# Altium PCB F100_V3.PcbDoc
Units mil, origin at the board's own origin, x right, y up, seen from the top; angles counter-clockwise.
Board outline 1968.74 x 1970.1 mil, 2 copper layers (Top Layer, Bottom Layer); 9 components, 8 nets, 28 pads, 3 vias.
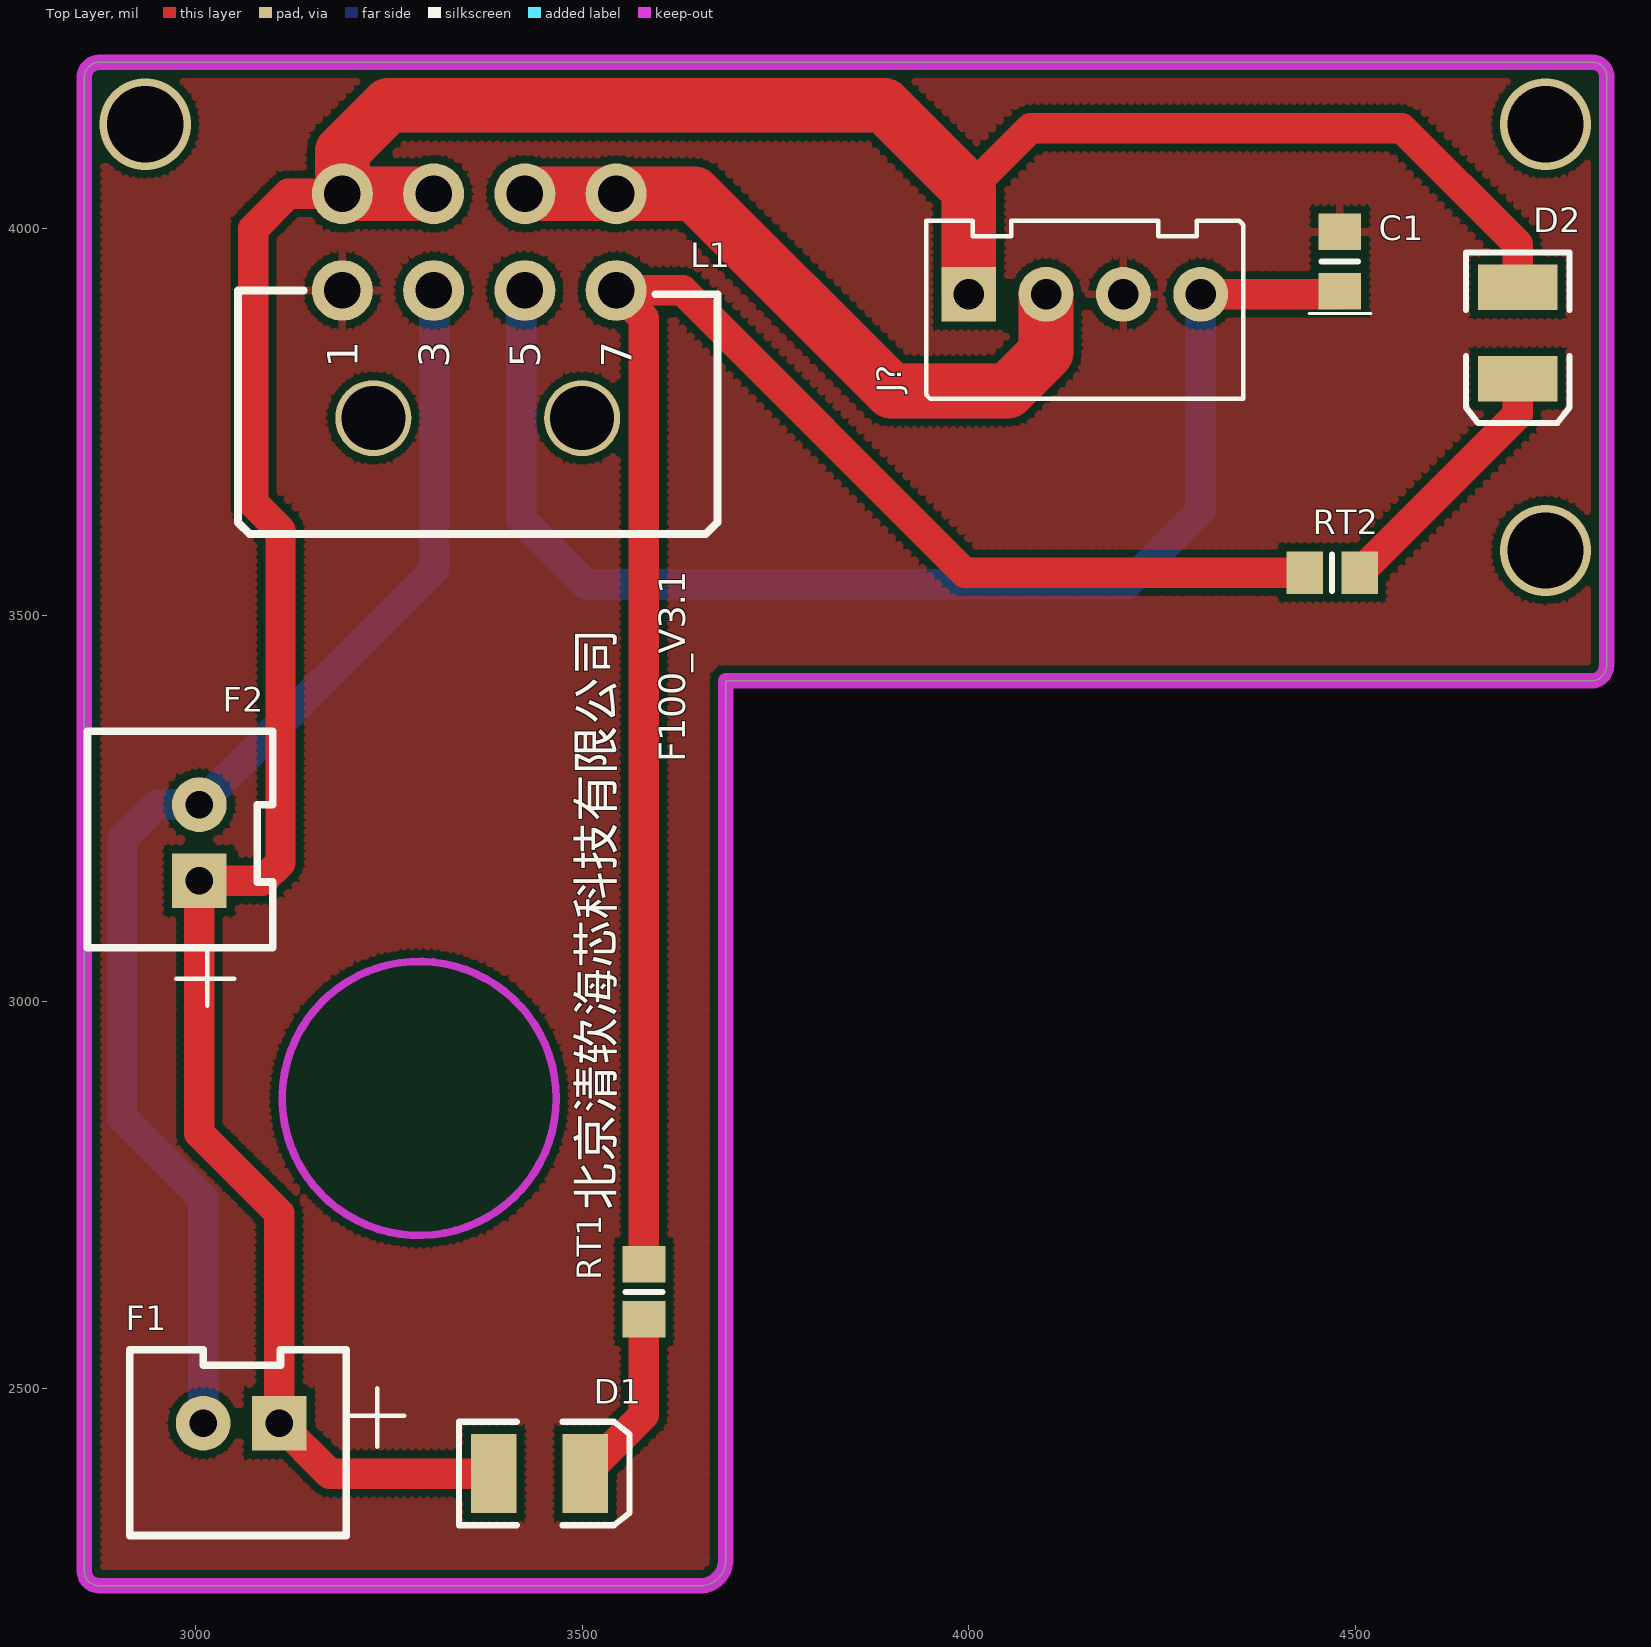
[diagram p0: Top Layer view]
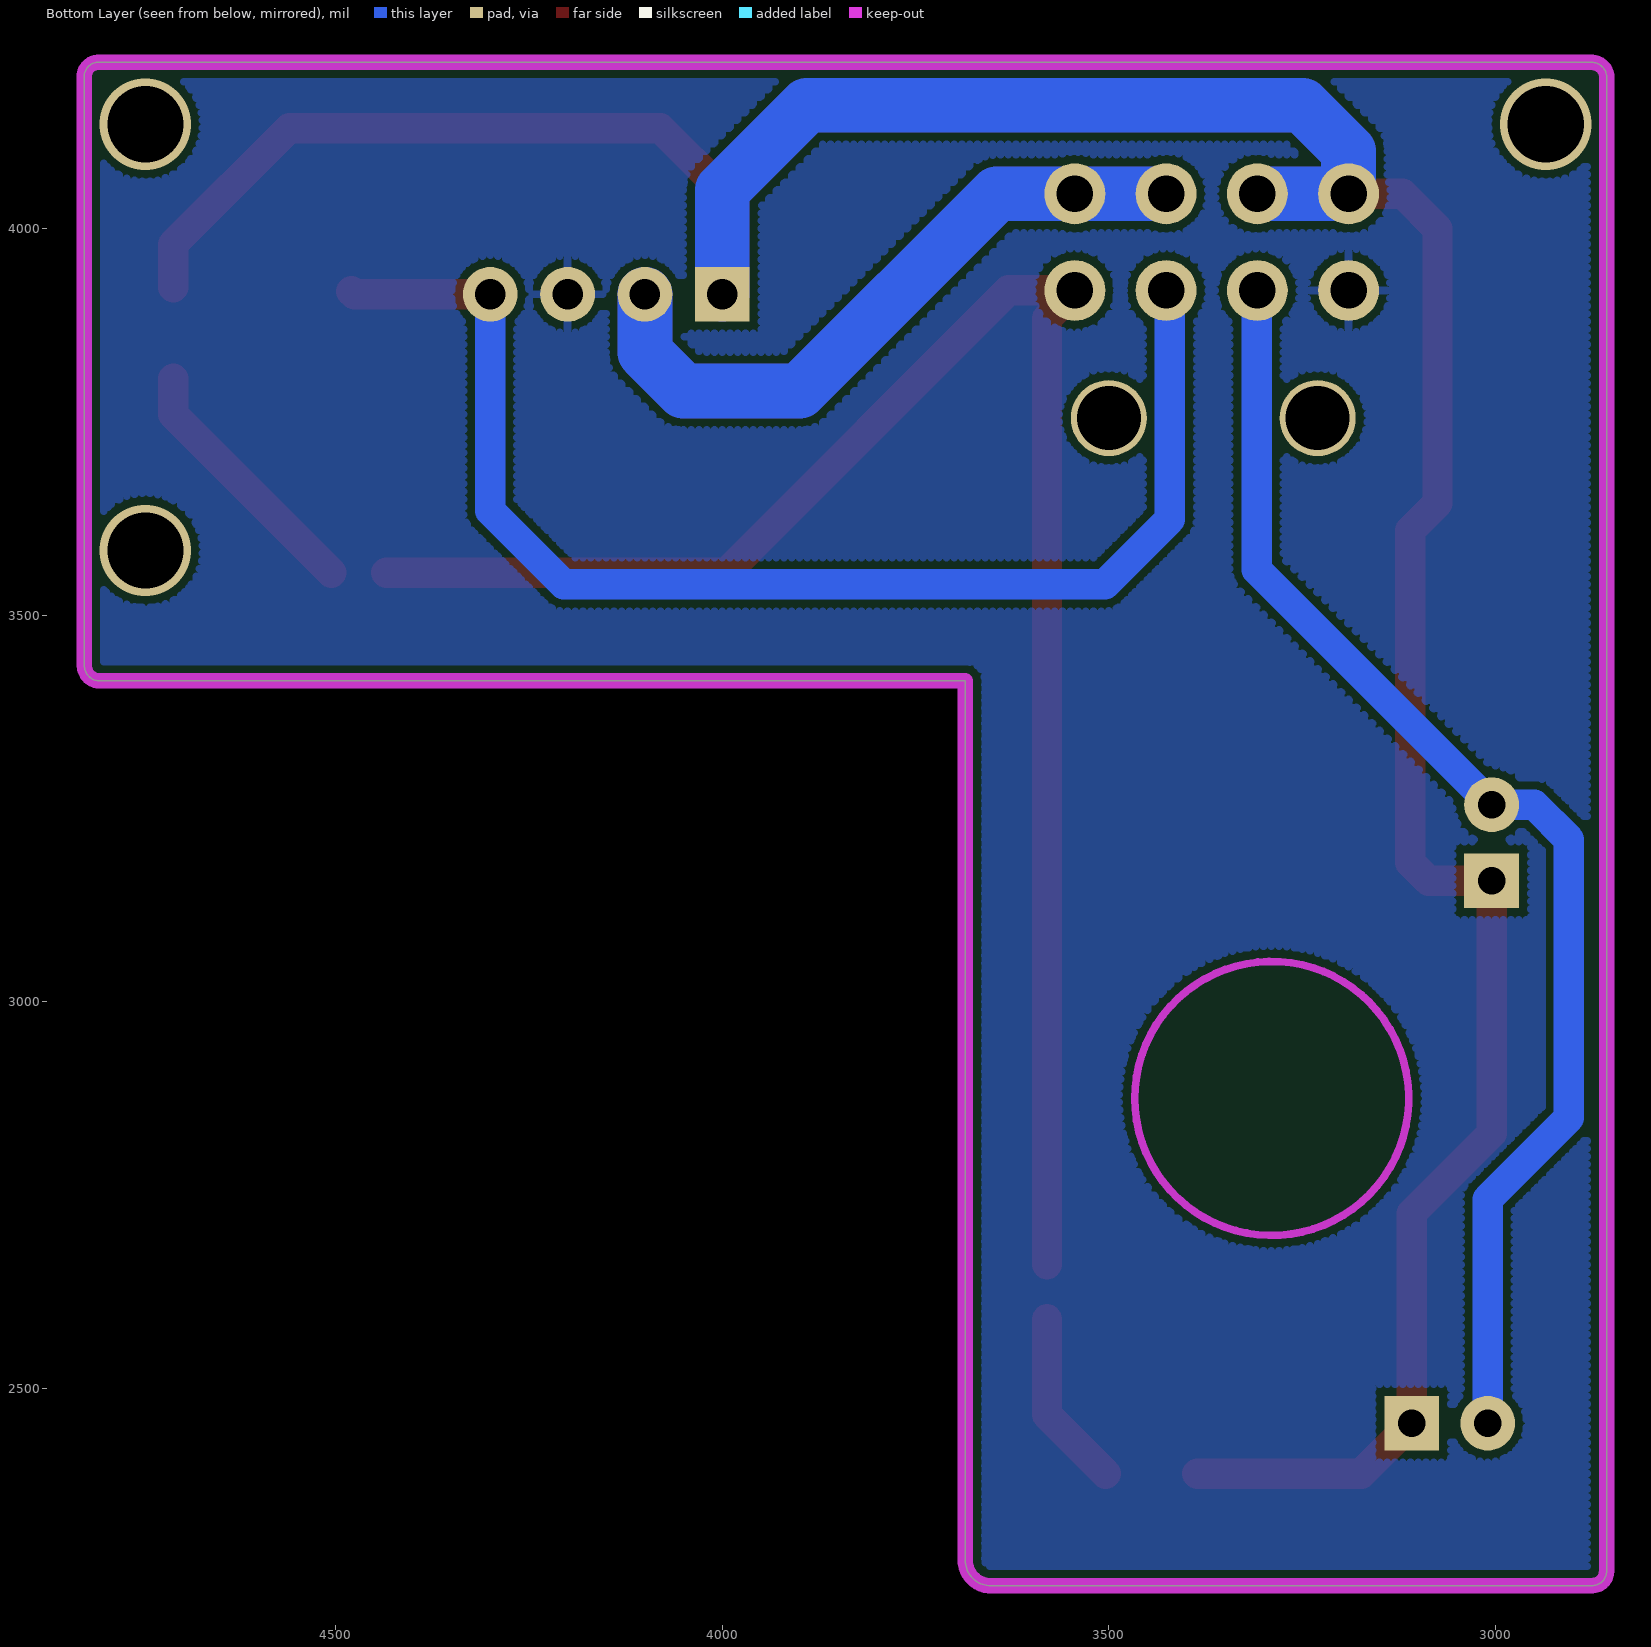
[diagram p1: Bottom Layer view, seen from below]

## Layer stack, top to bottom
Top Solder: solder mask 0.4, Solder Resist, Dk 3.5
Top Layer: signal copper 1.4
Dielectric 1: dielectric 12.6, FR-4, Dk 4.8
Bottom Layer: signal copper 1.4
Bottom Solder: solder mask 0.4, Solder Resist, Dk 3.5

## Board outline
2856.26,2263.74 2856.26,4195 cw(c2875.63,4195.63) 2875,4215 4805,4215 cw(c4806.82,4196.82) 4825,4198.64 4825,3435 cw(c4805,3435) 4805,3415 3685.6,3415 3685.6,2275 cw(c3652.8,2277.8) 3650,2245 2875,2245 cw(c2875,2263.74)

## Design rules (kind name [scope] priority, off if disabled: settings)
Clearance [All] p1: gap=10
PolygonConnect [All] p1: connectstyle=Relief reliefconductorwidth=10 reliefentries=4 polygonreliefangle="90 Angle" airgapwidth=10
RoutingVias [All] p1: holewidth=28 width=50 viastyle="Through Hole" minholewidth=28 minwidth=50 maxholewidth=28 maxwidth=50
SolderMaskExpansion [All] p1: expansion=4
Width [All] p1: maxlimit=196.85 minlimit=10 preferedwidth=10
30 further rules are at their usual default settings.

## Components (designator, comment, footprint, x,y, rotation, side; value= is the part's Value field where it differs from the comment)
C1 "Cap" 0805 4480,3915 r90 top
D1 "LED3" A190_LED 3445,2390 r0 top
D2 "LED3" A190_LED 4710,3865 r270 top
F1 "P2" P2_254 3010,2455 r0 top
F2 "P2" P2_254 3005,3255 r270 top
J? "CON4" DIP_4 4245,3915 r180 top
L1 "Component_8" M8 3190,3920 r90 top
RT1 "Res Thermal" 6-0805_N 3580,2625 r90 top
RT2 "Res Thermal" 6-0805_N 4470,3555 r180 top

## Footprints (in the part's own frame and the unit in brackets; to place one, negate y for a bottom-side part, rotate by r counter-clockwise, add the part's x,y. Pads: shape width x height; smd on the part's side, far side on the other; paste and mask are expansions set on the pad)
6-0805_N [mm] "Chip Resistor, Body 2.0x1.2mm, IPC Medium Density"
  rect 1.2x1.4 smd: 1(-0.9,0) 2(0.9,0)
  silkscreen extent 0,-0.6 0,0.6, body extent -1.07,-0.7 1.07,0.7, height 0.7
0805 [mm]
  rect 1.2x1.4 smd: 1(0.1,0) 2(2.05,0)
  silkscreen extent -0.64,-1.02 1.07,1.02, body extent 0,-0.7 2.15,0.7, height 0.65
A190_LED [mm]
  rect 1.5x2.6 smd: 1(-1.5,0) 2(1.5,0)
  silkscreen extent -2.65,-1.7 2.95,1.7
DIP_4 [mm]
  rect 1.8x1.8 hole 1: 1(6.223,0)
  round 1.8 hole 1: 2(3.683,0) 3(1.143,0) 4(-1.397,0)
  silkscreen extent -2.79,-2.41 7.62,3.43
M8 [mm]
  round 2 hole 1.2: 1(0,0) 2(3.175,0) 3(0,-2.997) 4(3.175,-2.997) 5(0,-5.994) 6(3.175,-5.994) 7(0,-8.992) 8(3.175,-8.992)
  round 2.5 hole 2.1: 9(-4.191,-1.016) 10(-4.191,-7.874)
  silkscreen extent -8,-12.32 0,3.43
P2_254 [mm]
  rect 1.8x1.8 hole 0.9: 1(2.5,0)
  round 1.8 hole 0.9: 2(0,0)
  silkscreen extent -2.41,-3.68 6.6,2.41

## Part data
C1: "Capacitor"
D1 D2: "Typical BLUE SiC LED"
RT1 RT2: "Thermistor"

## Via types
v1: diameter 118.11, hole 98.43, Top Layer to Bottom Layer, 3 vias

## Nets (pads, with @x,y where several pads share a name; then routed paths per layer and width w, separated by ;. In a path a pad name is that pad's centre, name@x,y a point inside that pad or via, vN(x,y) a via of type N, cw(c..) or ccw(c..) an arc to the next point about the centre after c; other vN are vias at no path point)
+12V: D1.1 D2.1 F1.1 F2.1 J?.1 L1.2 L1.4 | length 5369
  Top Layer w39.37: L1.2 3120,4045 3075,4000 3075,3645 3110,3610 3110,3180 3086.57,3156.57 F2.1 3005,2830 3108.43,2726.57 F1.1 3173.43,2390 D1.1 ; 4000,4050 4080,4130 4560,4130 4710,3980 D2.1
  Top Layer w70.87: L1.4 L1.2 3190,4100 3249.57,4159.57 3890.43,4159.57 4000,4050 J?.1
  Bottom Layer w70.87: L1.4 L1.2 3190,4100 3249.57,4159.57 3890.43,4159.57 4000,4050 J?.1
D_C: L1.7 RT1.2 RT2.2 | length 2316.2
  Top Layer w39.37: RT1.2 3580,3884 L1.7 3630,3920 3995,3555 RT2.2
F_C: F1.2 F2.2 L1.3 | length 1708.9
  Bottom Layer w39.37: F1.2 3010,2745 2905,2850 2905,3210 2950,3255 F2.2 3308.9,3558.9 3308.9,3920 L1.3
GND: C1.2 J?.3 L1.1
H_C: J?.2 L1.6 L1.8 | length 1750.7
  Top Layer w70.87: L1.6 L1.8 3645,4045 3900,3790 4050,3790 4100,3840 J?.2
  Bottom Layer w70.87: L1.6 L1.8 3645,4045 3900,3790 4050,3790 4100,3840 J?.2
NetD1_2: D1.2 RT1.1 | length 231
  Top Layer w39.37: D1.2 3580,2465.94 RT1.1
NetD2_2: D2.2 RT2.1 | length 335.7
  Top Layer w39.37: RT2.1 4710,3759.57 D2.2
TR_C: C1.1 J?.4 L1.5 | length 1715.6
  Top Layer w39.37: J?.4 4476.05,3915 C1.1
  Bottom Layer w39.37: L1.5 3421.1,3920 3421.1,3623.9 3505,3540 4205,3540 4300,3635 J?.4
pads on no net: L1.9 L1.10
copper on no net:
  other v1: 4746.02,3583.82 2935,4135 4746.02,4135

## Polygon pours and split planes (outlines as drawn)
GND on Top Layer "Top Layer-No Net" (hatched 90Degree grid 10 track 10, remove dead copper, pour order 7): 2856.26,2263.74 2856.26,4195 cw(c2875.63,4195.63) 2875,4215 4805,4215 cw(c4806.82,4196.82) 4825,4198.64 4825,3435 cw(c4805,3435) 4805,3415 3685.6,3415 3685.6,2275 cw(c3652.8,2277.8) 3650,2245 2875,2245 cw(c2875,2263.74)
GND on Bottom Layer "Top Layer-No Net1" (hatched 90Degree grid 10 track 10, remove dead copper, pour order 9): 2856.26,2263.74 2856.26,4195 cw(c2875.63,4195.63) 2875,4215 4805,4215 cw(c4806.82,4196.82) 4825,4198.64 4825,3435 cw(c4805,3435) 4805,3415 3685.6,3415 3685.6,2275 cw(c3652.8,2277.8) 3650,2245 2875,2245 cw(c2875,2263.74)

## Keep-outs
Keep-Out Layer:
  circle w10: c3289.33,2875.16 r177.17
  lines w20: 2856.26,2263.74 ccw(c2875,2263.74) 2875,2245 3650,2245 ccw(c3652.8,2277.8) 3685.6,2275 3685.6,3415 4805,3415 ccw(c4805,3435) 4825,3435 4825,4198.64 ccw(c4806.82,4196.82) 4805,4215 2875,4215 ccw(c2875.63,4195.63) 2856.26,4195 2856.26,2263.74

## Silkscreen, mask and mechanical layers (free items; w line width, h text height)
Top Overlay:
  text "F100_V3.1" at 3645,3310 h59.06 r90
  text "北京清软海芯科技有限公司" at 3555,2730 h78.74 r90

## Text inside footprints (layer, text, board x,y; h text height)
L1: Top Overlay "7" at 3564,3820 h39.37 r90; Top Overlay "5" at 3446,3820 h39.37 r90; Top Overlay "3" at 3328,3820 h39.37 r90; Top Overlay "1" at 3210,3820 h39.37 r90